# Altium PCB FireBeetle ESP32 IoT & Sensors.PcbDoc
Units mm, origin at the board's own origin, x right, y up, seen from the top; angles counter-clockwise.
Board outline 29 x 58 mm, 2 copper layers (Top Layer, Bottom Layer); 23 components, 19 nets, 146 pads, 41 vias.
Unrouted connection lines stored in the file: 2.
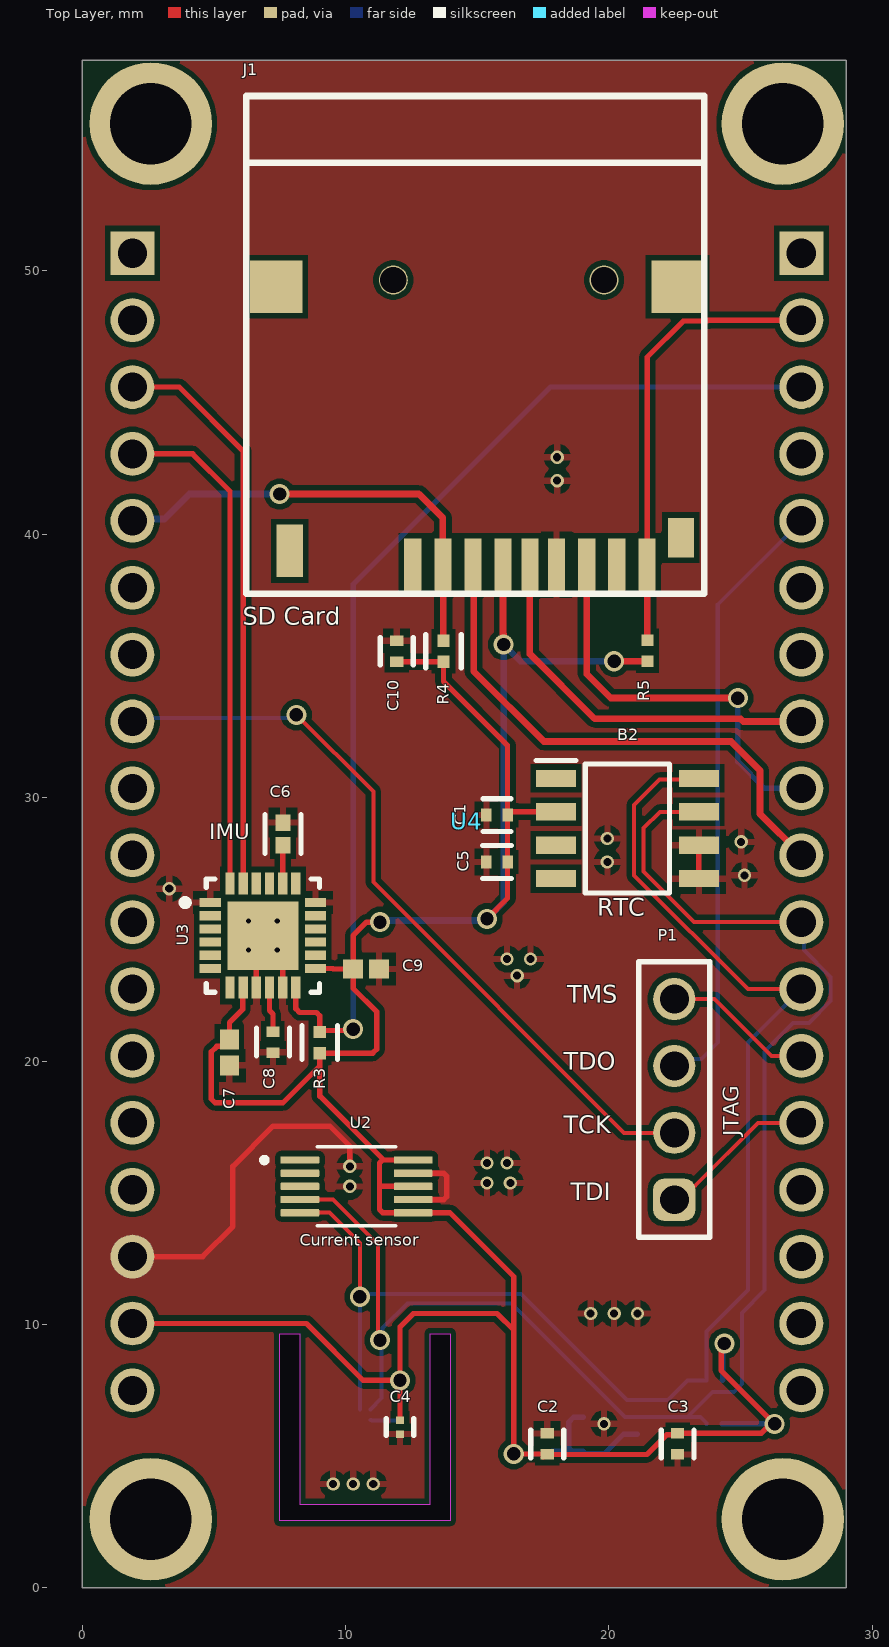
[diagram p0: Top Layer view]
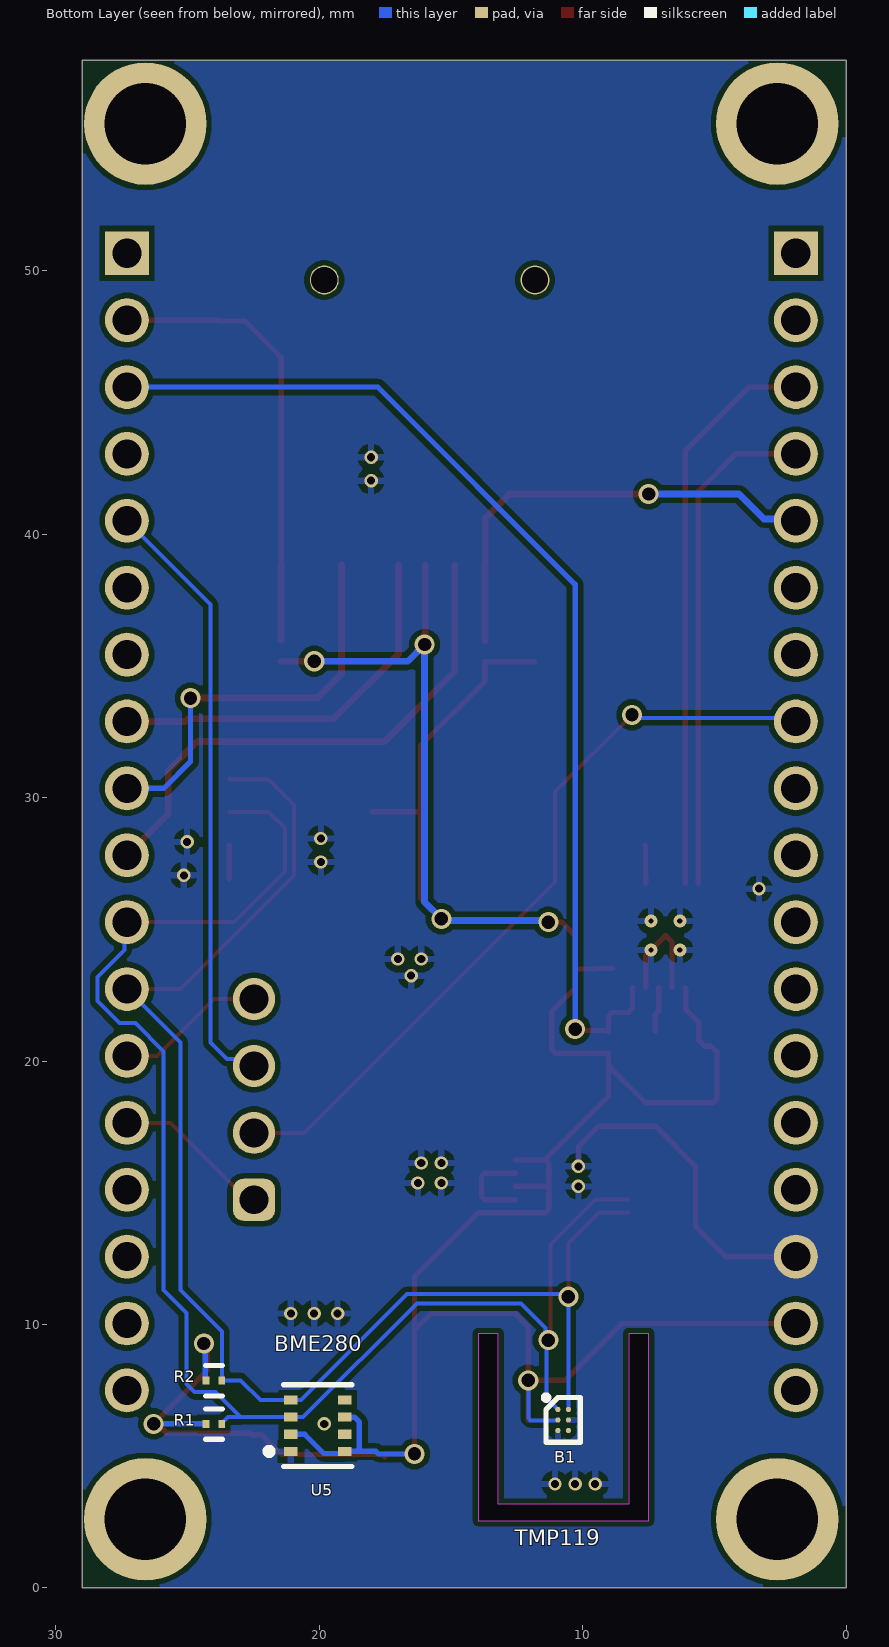
[diagram p1: Bottom Layer view, seen from below]
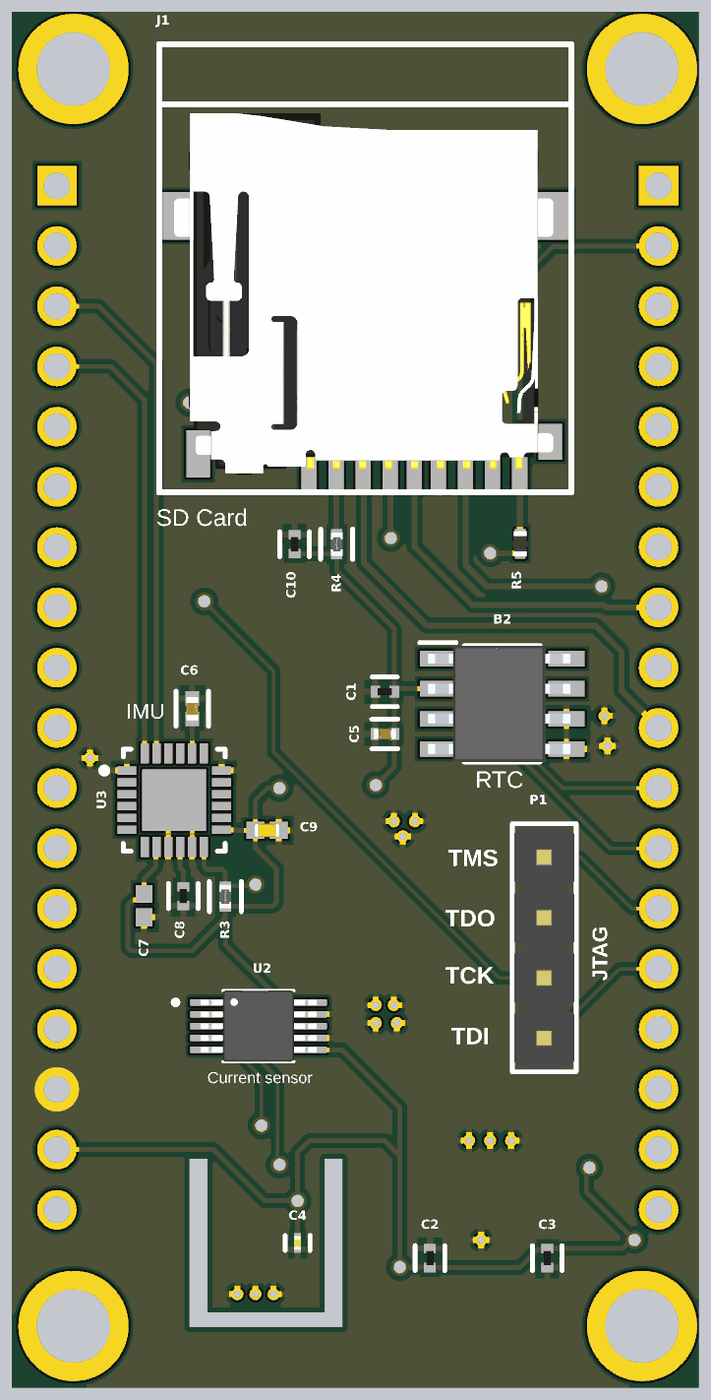
[diagram p2: 3D render of the assembled board from above, using the file's embedded part models]

## Layer stack, top to bottom
Top Solder: solder mask 0.0102, Solder Resist, Dk 3.5
Top Layer: signal copper 0.0356
Dielectric 1: dielectric 0.32, FR-4, Dk 4.8
Bottom Layer: signal copper 0.0356
Bottom Solder: solder mask 0.0102, Solder Resist, Dk 3.5

## Board outline
0,0 29,0 29,58 0,58
cut-out: 7.493,3.302 7.493,9.652 8.255,9.652 8.255,3.175 13.208,3.175 13.208,9.652 13.97,9.652 13.97,2.54 7.493,2.54

## Design rules (kind name [scope] priority, off if disabled: settings)
Clearance [All] p1: gap=0.203 ignorepadtopadclearanceinfootprint=TRUE
ComponentClearance [All] p1: gap=0.203 collisioncheckmode=3 verticalgap=2540 showdistances=TRUE donotcheckwithout3dbody=TRUE checkcomponentboundary=TRUE
PolygonConnect [All] p1: connectstyle=Relief reliefconductorwidth=0.254 reliefentries=4 polygonreliefangle="90 Angle" airgapwidth=0.254
RoutingVias [All] p1: holewidth=0.508 width=0.762 viastyle="Through Hole" minholewidth=0.508 minwidth=0.762 maxholewidth=0.508 maxwidth=0.762
SolderMaskExpansion [All] p1: expansion=0.102 istentingtop=FALSE
Width [All] p1: maxlimit=0.254 minlimit=0.152 preferedwidth=0.254
29 further rules are at their usual default settings.

## Components (designator, comment, footprint, x,y, rotation, side; value= is the part's Value field where it differs from the comment)
B1 "TMP119AIYBGR" BGA6C40P2X3_95X149X52 10.741,6.369 r180 bottom
B2 "DS3232MZ+" SOIC127P600X175-8N 20.701,28.829 r0 top
C1 "GRM155R71C104KA88D" FP-GRM15-MFG 15.748,29.337 r0 top value=0.10μF
C2 "GRM155R71C104KA88D" FP-GRM15-MFG 17.653,5.461 r270 top value=0.10μF
C3 "GRM155R71C104KA88D" FP-GRM15-MFG 22.606,5.461 r90 top value=0.10μF
C4 "CC0201KRX5R5BB104" FP-CC0201-BA-MFG 12.065,6.096 r270 top value="100 nF"
C5 "GRM155R61A105KE15D" FP-GRM15-0_1-MFG 15.748,27.559 r180 top value=1uF
C6 "GRM155R71H222KA01D" FP-GRM155-0_05-IPC_B 7.62,28.623 r90 top
C7 "GRM155R71E103KA01D" CAPC1005X55X25ML05T10 5.588,20.32 r90 top
C8 "GRM155R71C104KA88D" FP-GRM15-MFG 7.239,20.72 r90 top value=0.10μF
C9 "GRM155R61A104KA01D" CAPC1005X55X25ML5T10 10.777,23.495 r180 top
C10 "GRM155R71C104KA88D" FP-GRM15-MFG 11.938,35.56 r270 top value=0.10μF
J1 "Micro SD" TFP-09-2-12B 15.24,47.244 r270 top
P1 "61300411121" 61300411121 22.479,18.542 r90 top
R1 "ERJ-1GNF4701C" FP-ERJ0201-MFG 24.003,6.223 r180 bottom value=4.7kΩ
R2 "ERJ-1GNF4701C" FP-ERJ0201-MFG 24.003,7.874 r180 bottom value=4.7kΩ
R3 "ERJ-2RKF1003X" FP-ERJ2RK-IPC_C 9.017,20.701 r270 top
R4 "ERJ-2RKF1003X" FP-ERJ2RK-IPC_C 13.716,35.56 r270 top
R5 "ERJ-2RKF1004X" RESC1005X40X25LL05T05 21.463,35.579 r270 top
U2 "INA238AIDGST" SOP50P490X110-10N 10.414,15.24 r0 top
U3 "MPU-6050" IS-QFN-24_V 6.858,24.765 r0 top
U4 "Development Boards & Kits - Wireless FireBeetle ESP32 IOT MCU   Source:  Datasheet" FIREBEETLE_ESP32 14.605,25.273 r90 top
U5 "BME280" FP-BME280-MFG 20.057,6.152 r0 bottom

## Footprints (in the part's own frame and the unit in brackets; to place one, negate y for a bottom-side part, rotate by r counter-clockwise, add the part's x,y. Pads: shape width x height; smd on the part's side, far side on the other; paste and mask are expansions set on the pad)
61300411121 [mm] "Pin Header, pitch 2.54 mm, THT, Vertical, single row, 4p"
  rrect50% 1.6x1.6 hole 1.1: 1(-3.81,0)
  round 1.6 hole 1.1: 2(-1.27,0) 3(1.27,0) 4(3.81,0)
  silkscreen extent -5.23,-1.35 5.23,1.35, body extent -5.08,-1.27 5.08,1.27, height 8.57
BGA6C40P2X3_95X149X52 [mm]
  round 0.2 smd: A1(-0.2,0.4) A2(0.2,0.4) B1(-0.2,0) B2(0.2,0) C1(-0.2,-0.4) C2(0.2,-0.4)
  silkscreen extent -0.75,-0.85 0.65,0.95
CAPC1005X55X25ML05T10 [mm] "Chip Capacitor, 2-Leads, Body 1.00x0.50mm, IPC Low Density"
  rect 0.76x0.72 smd: 1(-0.49,0) 2(0.49,0)
  body extent -0.53,-0.28 0.53,0.27, height 0.55
CAPC1005X55X25ML5T10 [mm] "Chip Capacitor, 2-Leads, Body 1.05x0.55mm, IPC Low Density"
  rect 0.76x0.72 smd: 1(-0.49,0) 2(0.49,0)
  body extent -0.53,-0.28 0.53,0.28, height 0.55
FIREBEETLE_ESP32 [mm]
  rect 1.665x1.665 hole 1.11: 1(25.4,12.7) 19(25.4,-12.7)
  round 1.665 hole 1.11: 2(22.86,12.7) 3(20.32,12.7) 4(17.78,12.7) 5(15.24,12.7) 6(12.7,12.7) 7(10.16,12.7) 8(7.62,12.7) 9(5.08,12.7) 10(2.54,12.7) 11(0,12.7) 12(-2.54,12.7) 13(-5.08,12.7) 14(-7.62,12.7) 15(-10.16,12.7) 16(-12.7,12.7) 17(-15.24,12.7) 18(-17.78,12.7) 20(22.86,-12.7) 21(20.32,-12.7) 22(17.78,-12.7) 23(15.24,-12.7) 24(12.7,-12.7) 25(10.16,-12.7) 26(7.62,-12.7) 27(5.08,-12.7) 28(2.54,-12.7) 29(0,-12.7) 30(-2.54,-12.7) 31(-5.08,-12.7) 32(-7.62,-12.7) 33(-10.16,-12.7) 34(-12.7,-12.7) 35(-15.24,-12.7) 36(-17.78,-12.7)
  round 4.65 hole 3.1: MH1(-22.677,-12) MH2(-22.677,12) MH3(30.323,12) MH4(30.323,-12)
FP-BME280-MFG [mm]
  rect 0.5x0.35 smd paste+0 mask+0: 1(1.025,0.975) 2(1.025,0.325) 3(1.025,-0.325) 5(-1.025,-0.975) 6(-1.025,-0.325) 7(-1.025,0.325) 8(-1.025,0.975) ""(1.025,-0.975)
  silkscreen extent -1.3,-1.55 1.97,1.55
FP-CC0201-BA-MFG [mm]
  rect 0.28x0.3 smd paste+0 mask+0: 1(-0.265,0) 2(0.265,0)
  silkscreen extent -0.32,-0.53 0.32,0.53, body extent -0.51,-0.27 0.51,0.27, height 0.25
FP-ERJ2RK-IPC_C [mm]
  rect 0.468x0.472 smd paste+0 mask+0: 1(-0.402,0) 2(0.402,0)
  silkscreen extent -0.64,-0.67 0.64,0.67, body extent -0.74,-0.38 0.74,0.38, height 0.25
FP-ERJ0201-MFG [mm]
  rect 0.25x0.3 smd paste+0 mask+0: 1(-0.3,0) 2(0.3,0)
  silkscreen extent -0.32,-0.59 0.32,0.57, body extent -0.3,-0.15 0.3,0.15, height 0.26
FP-GRM15-0_1-MFG [mm]
  rect 0.4x0.5 smd paste+0 mask+0: 1(-0.4,0) 2(0.4,0)
  silkscreen extent -0.55,-0.63 0.55,0.63, body extent -0.7,-0.38 0.7,0.38, height 0.25
FP-GRM15-MFG [mm]
  rect 0.4x0.5 smd paste+0 mask+0: 1(-0.4,0) 2(0.4,0)
  silkscreen extent -0.53,-0.63 0.53,0.63, body extent -0.7,-0.38 0.7,0.38, height 0.25
FP-GRM155-0_05-IPC_B [mm]
  rect 0.615x0.572 smd paste+0 mask+0: 1(-0.429,0) 2(0.429,0)
  silkscreen extent -0.74,-0.69 0.74,0.69, body extent -0.89,-0.44 0.89,0.44, height 0.25
IS-QFN-24_V [mm] "QFN, 24-Leads, Body 4x4mm, Pitch 0.5mm, Thermal Pad 2.7x2.6mm"
  rect 0.8x0.35 smd: 1(-2,1.25) 2(-2,0.75) 3(-2,0.25) 4(-2,-0.25) 5(-2,-0.75) 6(-2,-1.25) 13(2,-1.25) 14(2,-0.75) 15(2,-0.25) 16(2,0.25) 17(2,0.75) 18(2,1.25)
  rect 0.35x0.85 smd mask+0.102: 7(-1.25,-1.975) 8(-0.75,-1.975) 9(-0.25,-1.975) 10(0.25,-1.975) 11(0.75,-1.975) 12(1.25,-1.975) 19(1.25,1.975) 20(0.75,1.975) 21(0.25,1.975) 22(-0.25,1.975) 23(-0.75,1.975) 24(-1.25,1.975)
  rect 2.7x2.6 smd: 25(0,0)
  silkscreen extent -3.07,-2.15 2.15,2.15, body extent -2,-2 2,2, height 0.95
RESC1005X40X25LL05T05 [mm] "Chip Resistor, 2-Leads, Body 1.05x0.55mm, IPC High Density"
  rect 0.45x0.45 smd: 1(-0.4,0) 2(0.4,0)
  body extent -0.53,-0.28 0.53,0.28, height 0.4
SOIC127P600X175-8N [mm]
  rect 1.525x0.65 smd: 1(-2.712,1.905) 2(-2.712,0.635) 3(-2.712,-0.635) 4(-2.712,-1.905) 5(2.712,-1.905) 6(2.712,-0.635) 7(2.712,0.635) 8(2.712,1.905)
  silkscreen extent -3.47,-2.45 1.6,2.58, body extent -3.13,-2.45 2.87,2.45, height 1.75
SOP50P490X110-10N [mm]
  rrect25% 1.47x0.28 smd: 1(-2.15,1) 2(-2.15,0.5) 3(-2.15,0) 4(-2.15,-0.5) 5(-2.15,-1) 6(2.15,-1) 7(2.15,-0.5) 8(2.15,0) 9(2.15,0.5) 10(2.15,1)
  silkscreen extent -3.6,-1.5 1.5,1.5, body extent -2.45,-1.5 2.45,1.5, height 1.1
TFP-09-2-12B [mm]
  rect 2x0.65 smd: 1(8.4,-2.69) 2(8.4,-1.547) 3(8.4,-0.404) 4(8.4,0.739) 5(8.4,1.755) 6(8.4,2.771) 7(8.4,3.914) 8(8.4,5.057) 9(8.4,6.2)
  rect 2x2 smd: 10(-2.159,7.366) 10(-2.159,-7.874)
  rect 1.5x1 smd: 10(7.366,7.493)
  rect 2x1 smd: 10(7.874,-7.366)
  round 1.1 hole 1: 20(-2.413,4.572) 20(-2.413,-3.429)
  silkscreen extent -9.4,-9.02 9.5,8.38, body extent -6.49,-8.38 8.76,7.62, height 1.95

## Part data
B1: "Board Mount Temperature Sensors TEMPERATURE SENSOR", Manufacturer_Name="Texas Instruments", Datasheet Link=https://www.ti.com/lit/ds/symlink/tmp119.pdf?ts=1711471230059&ref_url=https%253A%252F%252Fwww.ti.com%252Fsitesearch%252Fen-us%252Fdocs%252Funiversalsearch.tsp%253FlangPref%253Den-US%2526searchTerm%253Dtmp119%2526nr%253D70, Geometry.Height=0.525mm, Manufacturer_Part_Number=TMP119AIYBGR
B2: "Real Time Clock with SRAM I2C SOIC8 Maxim DS3232MZ+ Real Time Clock  Calendar, 236B RAM 8-Pin SOIC", Manufacturer_Name="Analog Devices", Mouser Part Number=700-DS3232MZ+, Arrow Part Number=DS3232MZ+, Arrow Price/Stock=https://www.arrow.com/en/products/ds3232mz/analog-devices?region=nac, Datasheet Link=https://datasheets.maximintegrated.com/en/ds/DS3232M.pdf, Geometry.Height=1.75mm, Manufacturer_Part_Number=DS3232MZ+, Mouser Price/Stock=https://www.mouser.co.uk/ProductDetail/Analog-Devices-Maxim-Integrated/DS3232MZ%2b?qs=jx0ze0HFsp7XmMGNDj6kPg%3D%3D
C1 C2 C3 C8 C10: library part CMP-2100-03641-2, "CAP CER 0.1UF 16V X7R 0402", Capacitance=0.10μF, Manufacturer=Murata, Package=GRM15, Temperature="-55°C to +125°C", Temperature Characteristic=X7R, Temperature Range High=+125°C, Temperature Range Low=-55°C, Tolerance=10%, Voltage Rating=16Vdc, Category=Cap, ComponentLink2Description=Datasheet, ComponentLink2URL=https://search.murata.co.jp/Ceramy/image/img/A01X/G101/ENG/GRM155R71H471KA01-01A.pdf, Device Class L1="Passive Components", Device Class L2=Capacitors, Device Class L3="Ceramic Capacitors", Digikey Description="CAP CER 0.1UF 16V X7R 0402", Height=0.55mm, Ipc Land Pattern Name=CAPC10050X219, Lead Free=yes, Manufacturer Part Number=GRM155R71C104KA88D, Material=Ceramic, Mouser Description="0402 0.1 uF 16V ±10 % Tolerance X7R SMT Multilayer Ceramic Capacitor", Octopart=https://octopart.com/grm155r71c104ka88d-murata-196880, RoHS=TRUE, Standoff Height=0mm
C4: library part CMP-03422-000376-1, "CAP CER 0.1UF 6.3V X5R 0201", Capacitance="100 nF", Manufacturer=Yageo, Package=CC0201-BA, Temperature="-55°C to +85°C", Temperature Characteristic=X5R, Temperature Coefficient=15%, Temperature Range High=+85°C, Temperature Range Low=-55°C, Tolerance=0.1, Voltage Rating="6.3 V", Automotive=No, Category=Cap, ComponentLink2Description=Datasheet, ComponentLink2URL=http://www.yageo.com/documents/recent/UPY-GPHC_X5R_4V-to-50V_25.pdf, Device Class L1="Passive Components", Device Class L2=Capacitors, Device Class L3="Ceramic Capacitors", Digikey Description="CAP CER 0.1UF 6.3V X5R 0201", Footprint Url=http://www.yageo.com/exep/pages/download/literatures/UPY-C_GEN_24.pdf, Height=0.33mm, Ipc Land Pattern Name=CAPC6030X30, Lead Free=Yes, Manufacturer Part Number=CC0201KRX5R5BB104, Material=Ceramic, Mouser Description="Multilayer Ceramic Capacitors MLCC - SMD/SMT 100nF 6.3V X5R 10%", Octopart=https://octopart.com/cc0201krx5r5bb104-yageo-9292636, RoHS=TRUE
C5: library part CMP-2008-04556-2, "CAP CER 1UF 10V X5R 0402", Capacitance=1uF, Manufacturer=Murata, Package=GRM15-0.1, Temperature="-55°C to +85°C", Temperature Characteristic=X5R, Temperature Coefficient=15%, Temperature Range High=+85°C, Temperature Range Low=-55°C, Tolerance=10%, Voltage Rating=10V, Automotive=No, Category=Cap, ComponentLink2Description=Datasheet, ComponentLink2URL=https://search.murata.co.jp/Ceramy/image/img/A01X/G101/ENG/GRM155R61A105KE15-01A.pdf, Device Class L1="Passive Components", Device Class L2=Capacitors, Device Class L3="Ceramic Capacitors", Digikey Description="CAP CER 1UF 10V X5R 0402", Height=0.55mm, Ipc Land Pattern Name=CAPC10050X50, Lead Free=Yes, Manufacturer Part Number=GRM155R61A105KE15D, Material=Ceramic, Mouser Description="0402 1 uF 10 V ±10% Tolerance X5R Surface Mount Multilayer Ceramic Capacitor", Octopart=https://octopart.com/grm155r61a105ke15d-murata-197442, RoHS=TRUE
C6: library part CMP-2008-04653-5, "Chip Multilayer Ceramic Capacitors for General Purpose, 0402, 2200pF, X7R, 15%, 10%, 50V", Capacitance=2.2nF, Case Code (Imperial)=0402, Case Code (Metric)=1005, Dielectric=X7R, Max Operating Temperature=125°C, Min Operating Temperature=-55°C, Package Quantity=1, Tolerance=10%, Voltage=50V, Case/Package=0402, Depth=0.5mm, Height=0.5mm, Lead Free="Lead Free", Length=1mm, Material=Ceramic, Mount="Surface Mount", Number of Pins=2, Packaging="Tape and Reel", Radiation Hardening=No, REACH SVHC="No SVHC", Termination=SMD/SMT, Thickness=0.022inch, Voltage Rating=50V, Voltage Rating (DC)=50V, Weight=2.3E-05oz, Width=0.5mm
C7: library part CMP-1034-01880-2, Manufacturer=Murata, Part Number=GRM155R71E103KA01D
C9: library part CMP-1662-00019-1, "Chip Capacitor, 100 nF, +/- 10%, 10 V, -55 to 85 degC, 0402 (1005 Metric), RoHS, Tape and Reel", Capacitance="100 nF", Case Code (Imperial)=0402, Case Code (Metric)=1005, Max Operating Temperature="85 degC", Min Operating Temperature="-55 degC", Package Quantity=1, Tolerance=10%, Type (Capacitors)=X5R, Voltage Rating="10 V", Case/Package=0402, ComponentLink1Description="Manufacturer URL", ComponentLink1URL=http://www.murata.com/, ComponentLink2Description=Datasheet, ComponentLink2URL=https://datasheet.ciiva.com/18102/getdatasheetpartid-74533-18102605.pdf, DatasheetVersion=05/2014, Height="0.5 mm", Length="1 mm", Mount="Surface Mount", Mounting Technology="Surface Mount", PackageDescription="2-Pin Surface Mount Device, Body 1 x 0.5 mm", Packaging="Cut Tape", PartNumber=GRM155R61A104KA01D, Pins=2, Radiation Hardening=No, REACH SVHC=Unknown, RoHSCompliant=true, Voltage Rating (DC)="10 V", Width="0.5 mm"
J1: library part "Micro SD TFP-09-2-12B", PartNumber=TFP-09-2-12B
P1: library part CMP-1502-01064-2, Color=Black, Contact Resistance=20mΩ, Current Rating=3A, Max Operating Temperature=105°C, Min Operating Temperature=-40°C, Operating Supply Voltage=250V, Connector Type="Male Pin", Contact Material=Copper, Contact Mating Length=5.9944mm, Contact Plating=Gold, Gender=Male, Height=8.89mm, Lead Free="Lead Free", Lead Pitch=2.54mm, Mount="Through Hole", NexarPartId=32855522, Number Of Contacts=4, Number of Pins=4, Number of Positions=4, Number of Rows=1, Orientation=Vertical, Packaging=Bulk, Pitch=2.54mm, REACH SVHC=Unknown, RoHS=Compliant, Termination=Solder, Voltage Rating=250V
R1 R2: library part CMP-1010-00492-3, "RES SMD 4.7K OHM 1% 1/20W 0201", Manufacturer="Panasonic Electronic Components", Package=ERJ0201, Power Rating=0.05W, Resistance=4.7kΩ, Temperature="-55°C to +125°C", Temperature Coefficient=200ppm/°C, Temperature Range High=+125°C, Temperature Range Low=-55°C, Tolerance=1%, Voltage Rating=25V, Automotive=Yes, Automotive Grade="Grade 1", Category=Res, ComponentLink2Description=Datasheet, ComponentLink2URL=https://industrial.panasonic.com/cdbs/www-data/pdf/RDA0000/AOA0000C304.pdf, Composition="Thick Film", Device Class L1="Passive Components", Device Class L2=Resistors, Device Class L3="Chip SMD Resistors", Digikey Description="RES SMD 4.7K OHM 1% 1/20W 0201", Footprint Url=https://industrial.panasonic.com/cdbs/www-data/pdf/RDA0000/DMA0000COL17.pdf, Height=0.26mm, Ipc Land Pattern Name=RESC6030X23, Lead Free=Yes, Manufacturer Part Number=ERJ-1GNF4701C, Mouser Description="Thick Film Resistors - SMD 0201 4.7Kohm 1% HalogenFree AEC-Q200", Octopart=https://octopart.com/erj-1gnf4701c-panasonic-55560010, RoHS=TRUE, Series=ERJ
R3 R4: library part CMP-2002-00608-4, "RES SMD 100K OHM 1% 1/10W 0402", Case Code (Imperial)=0402, Case Code (Metric)=1005, Max Operating Temperature=155°C, Max Power Dissipation=100mW, Min Operating Temperature=-55°C, Package Quantity=1, Resistance=100kR, Temperature Coefficient=100ppm/°C, Tolerance=1%, Voltage Rating=50V, Case/Package=0402, Composition="Thick Film", Contact Plating=Tin, Depth=0.5mm, Features="Automotive AEC-Q200", Height=0.35mm, Lead Free="Lead Free", Length=1mm, Military Standard=Not, Mount="Surface Mount", Number of Pins=2, Number of Terminations=2, Packaging="Tape and Reel", Power Rating=100mW, Radiation Hardening=No, REACH SVHC="No SVHC", Termination=SMD/SMT, Voltage Rating (DC)=50V, Width=0.5mm
R5: library part CMP-2002-00609-3, "Chip Resistor, 1 MOhm, +/- 1%, 100 mW, -55 to 155 degC, 0402 (1005 Metric), RoHS, Tape and Reel", Case Code (Imperial)=0402, Case Code (Metric)=1005, Manufacturer="Basic Passives", Max Operating Temperature="155 degC", Min Operating Temperature="-55 degC", Package Quantity=10000, Power Rating="100 mW", Resistance="1 MOhm", Tolerance=1%, Voltage Rating="50 V", Case\/Package=0402, ComponentLink1Description="Manufacturer URL", ComponentLink1URL=http://www.panasonic.com/, ComponentLink2Description=Datasheet, ComponentLink2URL=http://industrial.panasonic.com/cdbs/www-data/pdf/RDA0000/AOA0000C86.pdf, DatasheetVersion=04/2015, Height="0.35 mm", Length="1 mm", Mount="Surface Mount", Mounting Technology="Surface Mount", PackageDescription="2-Pin Surface Mount Device, Body 1 x 0.5 mm", PackageReference=0402, Packaging="Tape and Reel", PartNumber=ERJ-2RKF1004X, Pins=2, Radiation Hardening=No, REACH SVHC=Yes, RoHSCompliant=true, Weight=2.8E-05oz, Width="0.5 mm"
U2: Package=None, Availability=Unavailable, MP=INA238AIDGST, Price=None
U3: library part CMP-1753-00002-2, "3-Axis Gyroscope, Accelerometer and a Digital Motion Processor(TM) (DMP), 2.375 to 3.46 V, -40 to 85 degC, 24-Pin QFN, RoHS, Tape and Reel", Manufacturer=InvenSense, Standard Package=5,000, Category=Sensors,Transducers, Datasheet URL=http://datasheet.octopart.com/MPU-6050-InvenSense-datasheet-14421344.pdf, Datasheet Version="Rev. 3.3, 05/2012", Dynamic Catalog=MPU-6000™Series, Family=Multifunction, Featured Product=MPU-60506-Axis,IntegratedI²CSolution, Manufacturer URL=http://www.invensense.com/, Online Catalog=MPU-6000™Series, Other Names="1428-1007-2 / MPU6050", Output Type=Digital, Sensor Type=MotionTracking, Unit PriceUSD=Digital
U4: library part DFR0478, Manufacturer_Name=DFRobot, Package=FIREBEETLE_ESP32, Arrow_Part_Number=DFR0478, Arrow_Price-Stock=https://www.arrow.com/en/products/dfr0478/dfrobot?region=nac, DeviceSetName=DFR0478, GateName_1=G$1, Height=mm, LibraryName=DFR0478, Manufacturer_Part_Number=DFR0478, Mouser_Part_Number=426-DFR0478, Mouser_Price-Stock=https://www.mouser.co.uk/ProductDetail/DFRobot/DFR0478?qs=EU6FO9ffTwc%252BR65h2NUGQw%3D%3D, SymbolName_1=DFR0478
U5: library part CMP-2000-05073-3, "SENSOR PRESSURE HUMIDITY TEMP", Case/Package=LGA, Max Operating Temperature=85°C, Min Operating Temperature=-40°C, Accuracy=3%, Lead Free="Lead Free", Mount="Surface Mount", Number of Pins=8, Output Type=SPI, Packaging="Cut Tape", Response Time=1s, Sensor Type=Temperature

## Via types
v1: diameter 0.508, hole 0.305, Top Layer to Bottom Layer, 23 vias
v2: diameter 0.762, hole 0.508, Top Layer to Bottom Layer, tented both sides, 14 vias
v3: diameter 0.5, hole 0.2, Top Layer to Bottom Layer, 4 vias

## Nets (pads, with @x,y where several pads share a name; then routed paths per layer and width w, separated by ;. In a path a pad name is that pad's centre, name@x,y a point inside that pad or via, vN(x,y) a via of type N, cw(c..) or ccw(c..) an arc to the next point about the centre after c; other vN are vias at no path point)
+3.3V: B1.B1 B2.2 C1.2 C2.2 C3.2 C4.1 C5.1 C7.2 C9.2 C10.2 J1.4 R1.1 R2.1 R3.2 R4.2 R5.2 U2.6 U2.8 U2.10 U3.8 U3.13 U4.17 U5.2 U5.6 U5.8 | length 127.1
  Top Layer w0.203: U4.17 8.509,10.033 10.668,7.874 v2(12.065,7.874) ; C7.2 5.588,20.79 5.355,20.557 5.108,20.557 4.898,20.347 4.898,18.564 5.047,18.415 7.62,18.415 9.017,19.812 R3.2 11.027,20.299 11.176,20.448 11.176,21.873 10.287,22.762 C9.2 ; C7.2@5.588,20.923 5.588,21.463 6.088,21.963 6.088,22.725 6.108,22.745 U3.8 ; U3.13 9.505,23.515 9.525,23.495 C9.2 ; 9.019,19.812 9.019,18.667 11.446,16.24 ; v2(11.303,25.273) 10.795,25.273 10.287,24.765 C9.2 ; C10.2 11.83,35.16 11.831,35.159 R4.2 R4.2 13.716,34.417 16.148,31.985 C1.2@16.148,29.366 ; C4.1 v2(12.065,7.874) ; U2.8 11.287,15.24 ; U2.10 11.446,16.24 ; v2(15.367,25.4) 16.148,26.181 C5.1 C1.2 C1.2@16.148,29.366 ; B2.2 16.246,29.464 C1.2@16.148,29.366 ; v2(24.384,9.271) 24.257,9.144 24.257,8.255 v2(26.289,6.223) 26.138,6.223 25.776,5.861 C3.2 22.55,5.805 22.188,5.805 21.444,5.061 C2.2 17.603,5.061 17.505,4.963 17.505,5.08 v2(16.383,5.08) 16.383,9.779 ; 11.287,15.24 11.287,16.121 11.406,16.24 11.446,16.24 ; 11.287,15.24 11.287,14.359 11.406,14.24 U2.6 13.954,14.24 16.383,11.811 16.383,9.779 ; v2(12.065,7.874) 12.065,9.906 12.573,10.414 15.748,10.414 16.383,9.779
  Top Layer w0.254: J1.4 15.979,36.218 16.002,36.195 v2(16.002,35.814) ; v2(20.193,35.179) R5.2
  Bottom Layer w0.152: B1.B1 10.95,6.36 10.984,6.36 10.994,6.35 11.976,6.35 12.065,6.439 v2(12.065,7.874)
  Bottom Layer w0.203: v2(16.383,5.08) 17.751,5.08 17.848,5.177 U5.8 ; U5.8 18.596,5.178 18.477,5.297 18.477,6.293 18.661,6.477 U5.6 ; U5.8@19.032,5.098 19.83,5.098 20.559,5.827 U5.2 ; R1.1 v2(26.289,6.223) ; R2.1 24.326,7.897 24.326,9.213 v2(24.384,9.271)
  Bottom Layer w0.254: v2(11.303,25.273) 11.367,25.336 15.303,25.336 v2(15.367,25.4) 16.002,26.035 v2(16.002,35.814) 16.637,35.179 v2(20.193,35.179)
ALERT: B1.C2
DETECT: J1.9 R5.1 U4.20 | length 17.4
  Top Layer w0.203: J1.9@21.451,38.833 21.451,46.724 22.825,48.098 23.732,48.098 23.767,48.133 U4.20
  Top Layer w0.254: J1.9@21.451,38.833 21.451,35.991 R5.1
  Bottom Layer w0.203: U4.20@27.051,48.133 U4.20
GND: B1.B2 B1.C1 B2.5 B2.6 C1.1 C2.1 C3.1 C4.2 C5.2 C6.2 C7.1 C8.1 C9.1 C10.1 J1.6 U2.7 U2.9 U3.1 U3.9 U3.11 U3.18 U3.25 U4.16 U5.1 U5.7 | length 22
  Top Layer w0.203: U4.16 2.159,12.319 2.413,12.573 4.572,12.573 5.715,13.716 5.715,16.002 7.239,17.526 9.398,17.526 10.16,16.764 v1(10.16,16.002) ; U3.9 6.608,24.515 U3.25 v3(7.408,24.215) 7.608,24.015 U3.11 ; U2.7 12.572,14.732 13.724,14.732 13.843,14.851 13.843,15.621 13.724,15.74 U2.9 ; B2.5 B2.6
  other v1: 9.525,3.937 10.287,3.937 11.049,3.937 19.812,6.223 19.304,10.414 20.193,10.414 21.082,10.414 10.16,15.24 15.367,15.367 16.256,15.367 15.367,16.129 16.129,16.129 16.51,23.241 16.129,23.876 17.018,23.876 3.302,26.543 25.146,27.051 19.939,27.559 25.019,28.321 19.939,28.448 18.034,42.037 18.034,42.926
  other v3: 6.308,24.215 6.308,25.315 7.408,25.315
MISO: J1.7 U4.27 | length 15.5
  Top Layer w0.254: J1.7 19.154,34.694 20.066,33.782 v2(24.892,33.782)
  Bottom Layer w0.203: v2(24.892,33.782) 24.892,31.369 25.908,30.353 U4.27
MOSI: J1.3 U4.28 | length 20.4
  Top Layer w0.254: J1.3 14.859,38.821 14.859,34.798 17.526,32.131 24.638,32.131 25.736,31.033 25.736,29.382 U4.28
MPU_INT: R3.1 U3.12 U4.21 | length 40.8
  Top Layer w0.203: U3.12 8.088,22.77 8.108,22.75 8.108,21.991 8.255,21.844 8.89,21.844 9.017,21.717 R3.1 9.07,21.156 10.234,21.156 v2(10.287,21.209)
  Bottom Layer w0.203: v2(10.287,21.209) 10.287,38.1 17.78,45.593 U4.21
MPU_SCL: U3.23 U4.3 | length 21.6
  Top Layer w0.203: U4.3 3.683,45.593 6.108,43.168 U3.23
MPU_SDA: U3.24 U4.4 | length 19.2
  Top Layer w0.203: U4.4 4.191,43.053 5.608,41.636 U3.24
NetC6_1: C6.1 U3.20 | length 1.5
  Top Layer w0.203: U3.20 7.608,27.039 7.614,27.045 7.614,28.188 C6.1
NetC8_2: C8.2 U3.10 | length 1.7
  Top Layer w0.203: U3.10 7.108,21.918 7.239,21.787 C8.2
SCK: J1.5 U4.26 | length 14.8
  Top Layer w0.254: J1.5 16.995,35.456 19.456,32.995 24.996,32.995 25.097,32.893 U4.26
SCL: B1.A2 B2.8 R2.2 U2.5 U4.30 U5. | length 54.3
  Top Layer w0.152: U2.5 9.382,14.24 10.541,13.081 v2(10.541,11.049) ; B2.8 23.413,30.689 21.926,30.689 20.955,29.718 20.955,27.051 25.273,22.733 U4.30
  Bottom Layer w0.152: B1.A2 v2(10.541,11.049) 10.643,11.151 16.662,11.151 20.686,7.127 U5. 22.24,7.127 22.987,7.874 R2.2 23.703,9.733 25.273,11.303 25.273,20.701 U4.30
SD_CS: J1.2 R4.1 U4.5 | length 17.3
  Top Layer w0.254: v2(7.493,41.529) 12.781,41.529 13.693,40.617 J1.2 13.705,38.832 13.705,35.974 R4.1
  Bottom Layer w0.254: U4.5 1.975,40.583 3.118,40.583 4.064,41.529 v2(7.493,41.529)
SDA: B1.A1 B2.7 R1.2 U2.4 U4.29 U5.3 | length 58.4
  Top Layer w0.152: U2.4 9.517,14.74 11.223,13.034 11.223,9.478 v2(11.303,9.398) ; B2.7 21.933,29.464 21.311,28.841 21.311,27.198 23.236,25.273 U4.29
  Bottom Layer w0.152: B1.A1 11.369,7.197 11.369,9.332 v2(11.303,9.398) 11.404,9.499 11.404,9.854 12.344,10.795 16.294,10.795 20.612,6.477 U5.3 22.987,6.477 ; R1.2 23.703,6.248 23.474,6.477 22.987,6.477 ; U4.29 27.399,25.179 27.399,24.212 28.417,23.194 28.417,22.272 27.592,21.447 26.987,21.447 25.908,20.368 25.908,11.303 25.044,10.439 25.044,7.735 24.739,7.43 23.94,7.43 22.987,6.477
TCK: P1.2 U4.8 | length 29.4
  Top Layer w0.152: v2(8.128,33.147) 11.049,30.226 11.049,26.797 20.574,17.272 22.352,17.272 22.479,17.145 P1.2
  Bottom Layer w0.152: U4.8 2.042,33.03 8.011,33.03 v2(8.128,33.147)
TDI: P1.1 U4.32 | length 6.2
  Top Layer w0.152: P1.1 22.606,14.605 22.606,14.684 23.178,15.256 23.257,15.256 25.654,17.653 U4.32
TDO: P1.3 U4.23 | length 23.1
  Bottom Layer w0.152: P1.3 22.746,20.079 23.508,20.079 24.13,20.701 24.13,37.338 U4.23
TMS: P1.4 U4.31 | length 5.7
  Top Layer w0.152: P1.4 24.003,22.352 26.162,20.193 U4.31
pads on no net: B2.1 B2.3 B2.4 J1.1 J1.8 J1.10 J1.20 U2.1 U2.2 U2.3 U3.2 U3.3 U3.4 U3.5 U3.6 U3.7 U3.14 U3.15 U3.16 U3.17 U3.19 U3.21 U3.22 U4.1 U4.2 U4.6 U4.7 U4.9 U4.10 U4.11 U4.12 U4.13 U4.14 U4.15 U4.18 U4.19 U4.22 U4.24 U4.25 U4.33 U4.34 U4.35 U4.36 U4.MH1 U4.MH2 U4.MH3 U4.MH4 U5.5

## Polygon pours and split planes (outlines as drawn)
GND on Bottom Layer "GND_L02_P001" (solid, remove dead copper, pour order 1): 0,0 29,0 29,58 0,58
GND on Top Layer "GND_L01_P000" (solid, remove dead copper, pour order 0): 0,0 29,0 29,58 0,58

## Silkscreen, mask and mechanical layers (free items; w line width, h text height)
Top Overlay:
  text "SD Card" at 6.096,36.335 h1.14
  text "IMU" at 4.826,28.205 h1.02
  text "RTC" at 19.558,25.286 h1.14
  text "TMS" at 18.415,21.985 h1.14
  text "TDO" at 18.288,19.445 h1.14
  text "JTAG" at 25.134,17.145 h1.02 r90
  text "TCK" at 18.288,17.031 h1.14
  text "TDI" at 18.542,14.478 h1.14
  text "Current sensor" at 8.255,12.835 h0.76
Bottom Overlay:
  text "BME280" at 21.717,8.774 h1.02
  text "TMP119" at 12.573,1.397 h1.02